# Altium PCB Eurocard VME 3U (3.937 x 6.299 inches).PCBDOC
Units mm, origin at the board's own origin, x right, y up, seen from the top; angles counter-clockwise.
Board outline 159.99 x 100 mm, 8 copper layers (TopLayer, MidLayer1, MidLayer2, MidLayer3, MidLayer4, MidLayer5, MidLayer6, BottomLayer); 1 components, 0 nets, 100 pads, 0 vias.
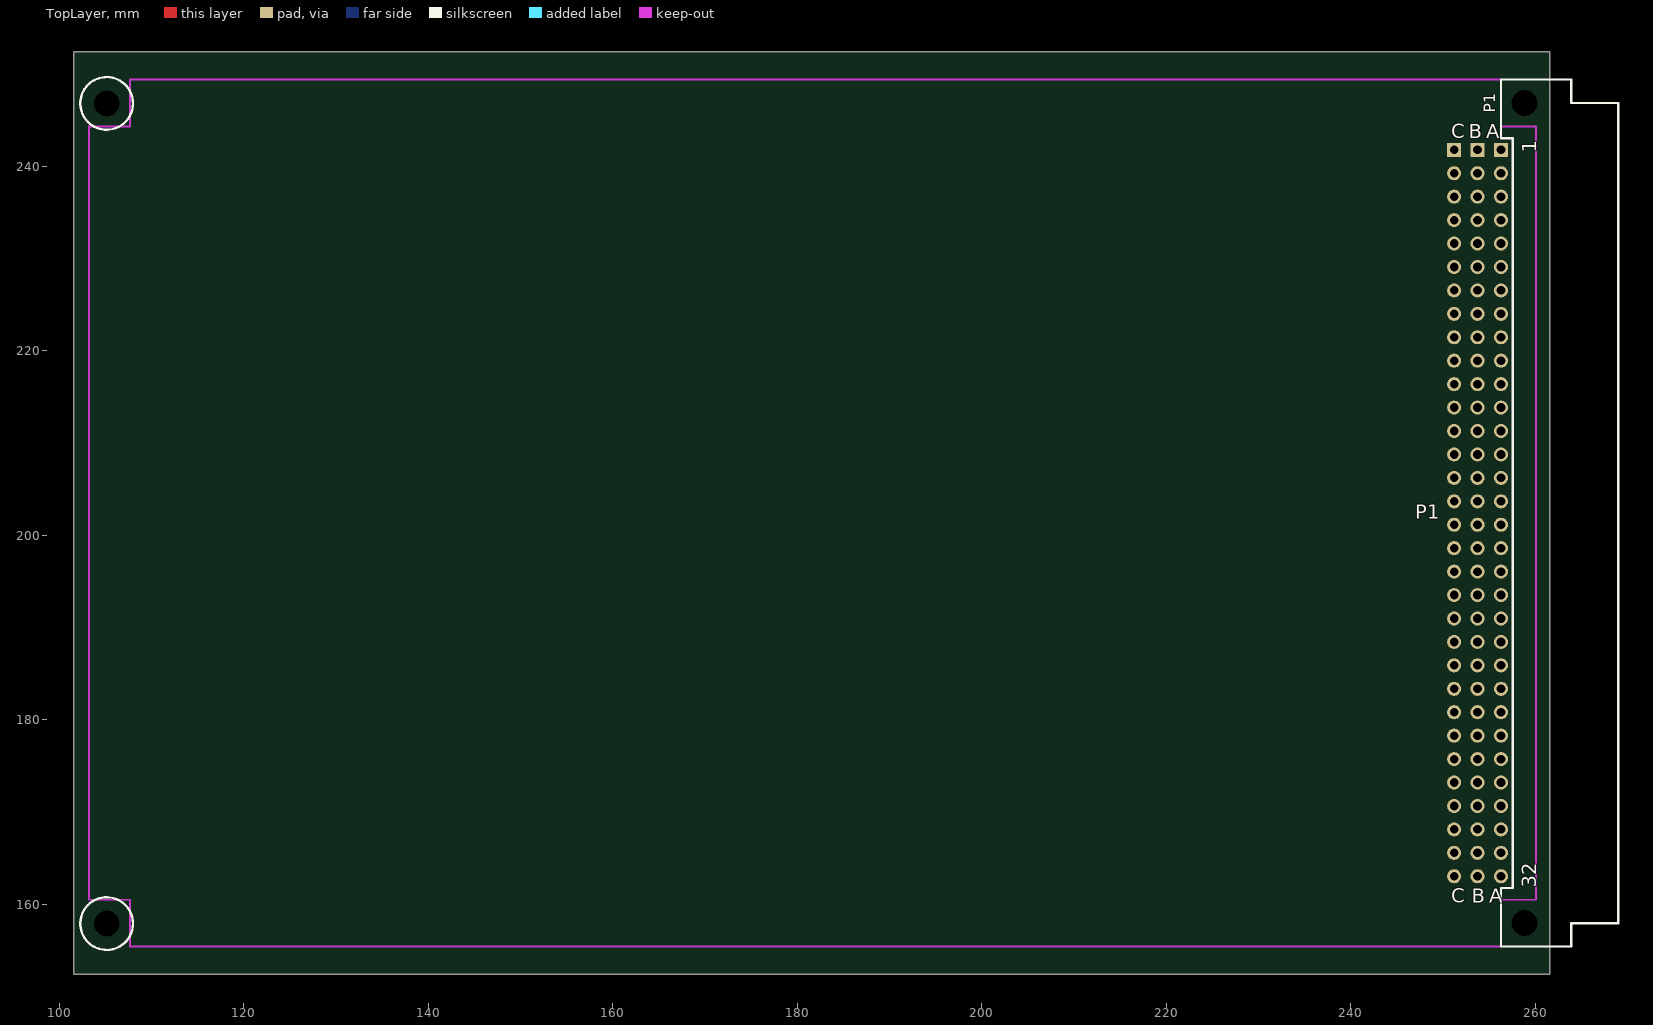
[diagram p0: TopLayer view]
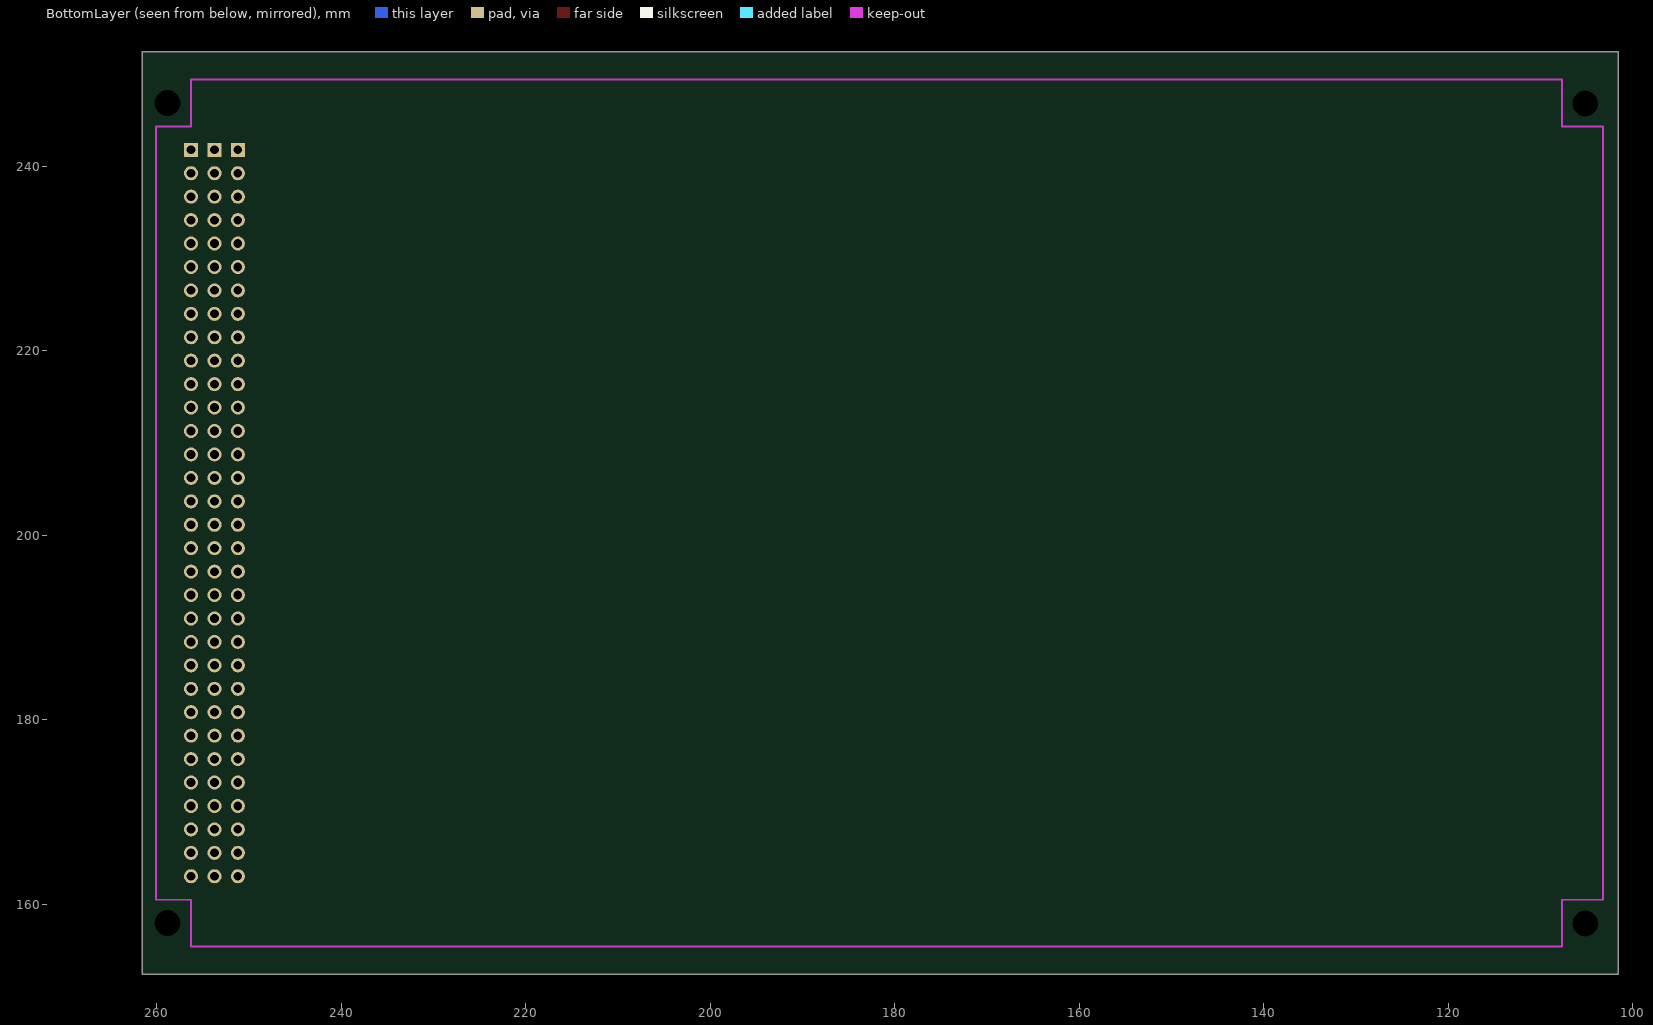
[diagram p1: BottomLayer view, seen from below]
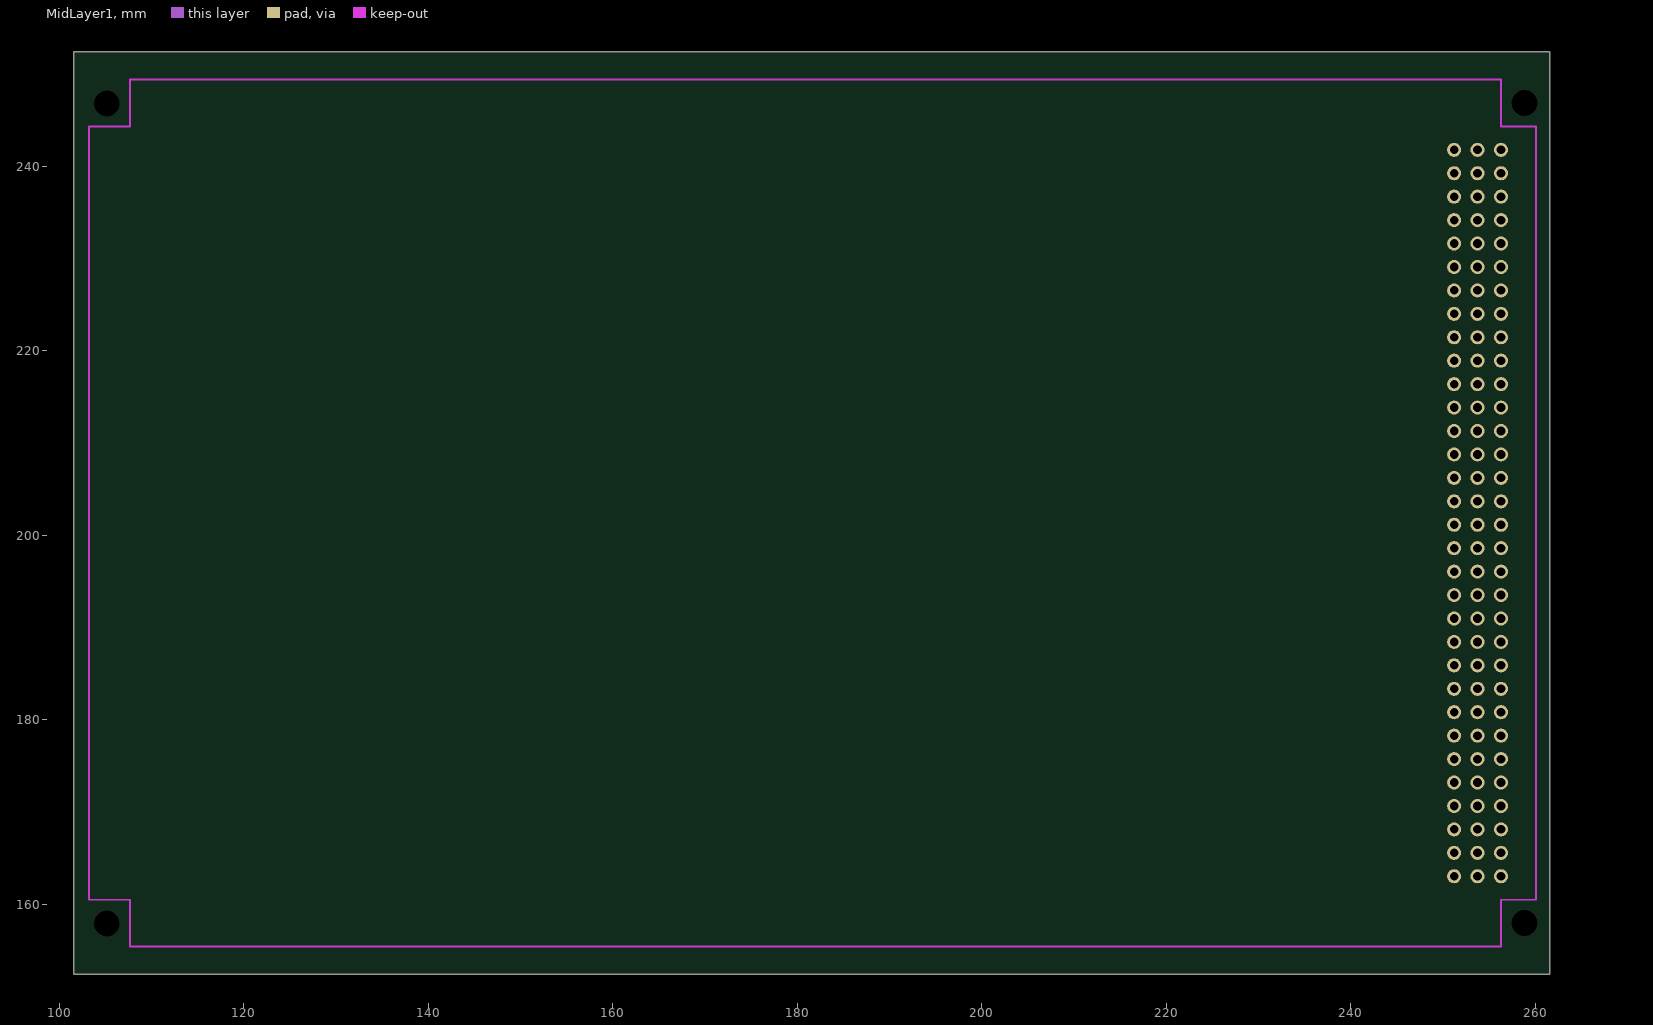
[diagram p2: MidLayer1]
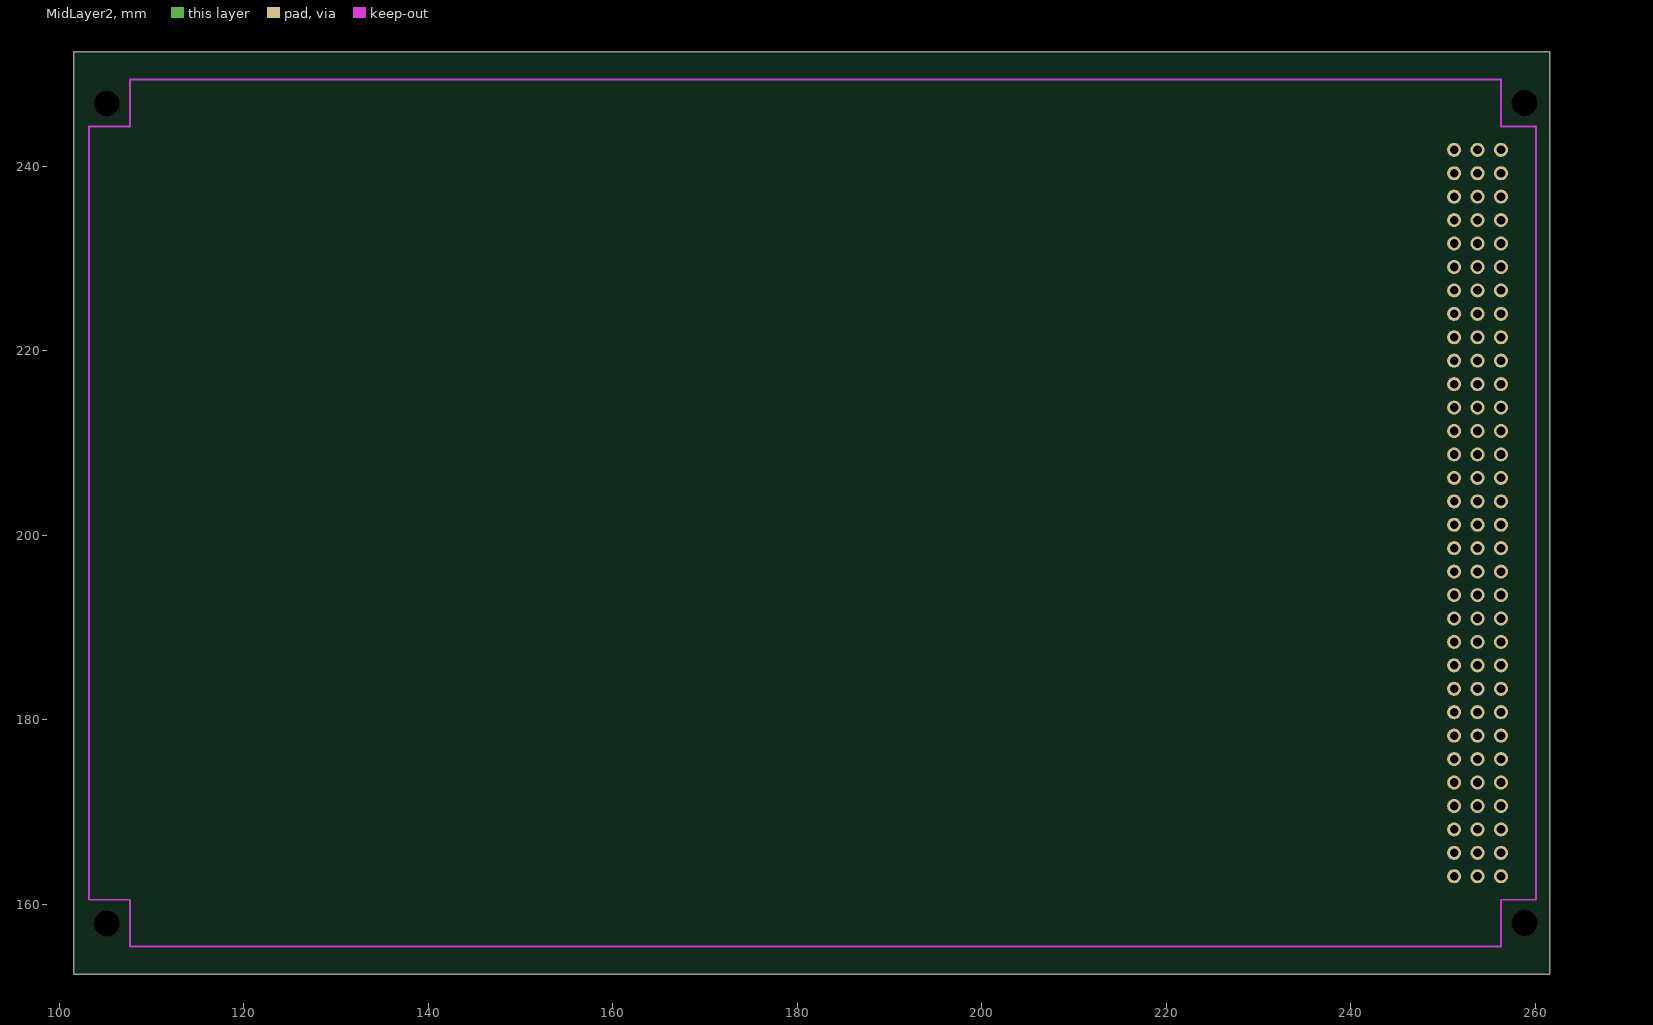
[diagram p3: MidLayer2]
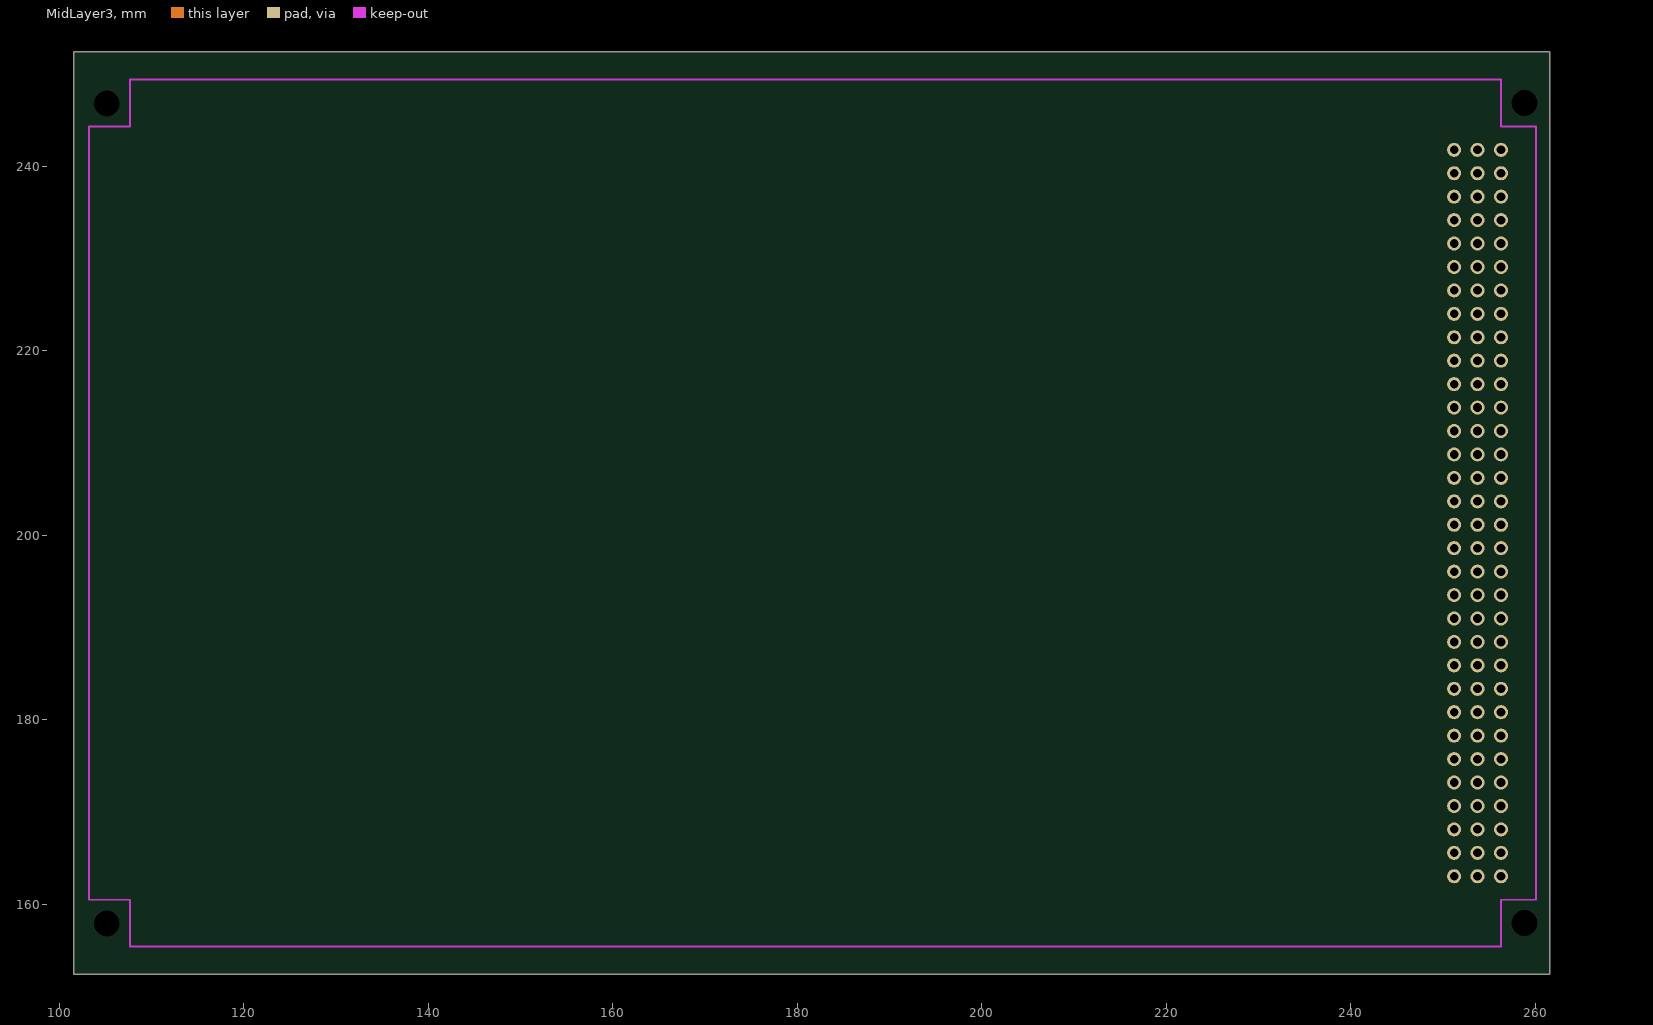
[diagram p4: MidLayer3]
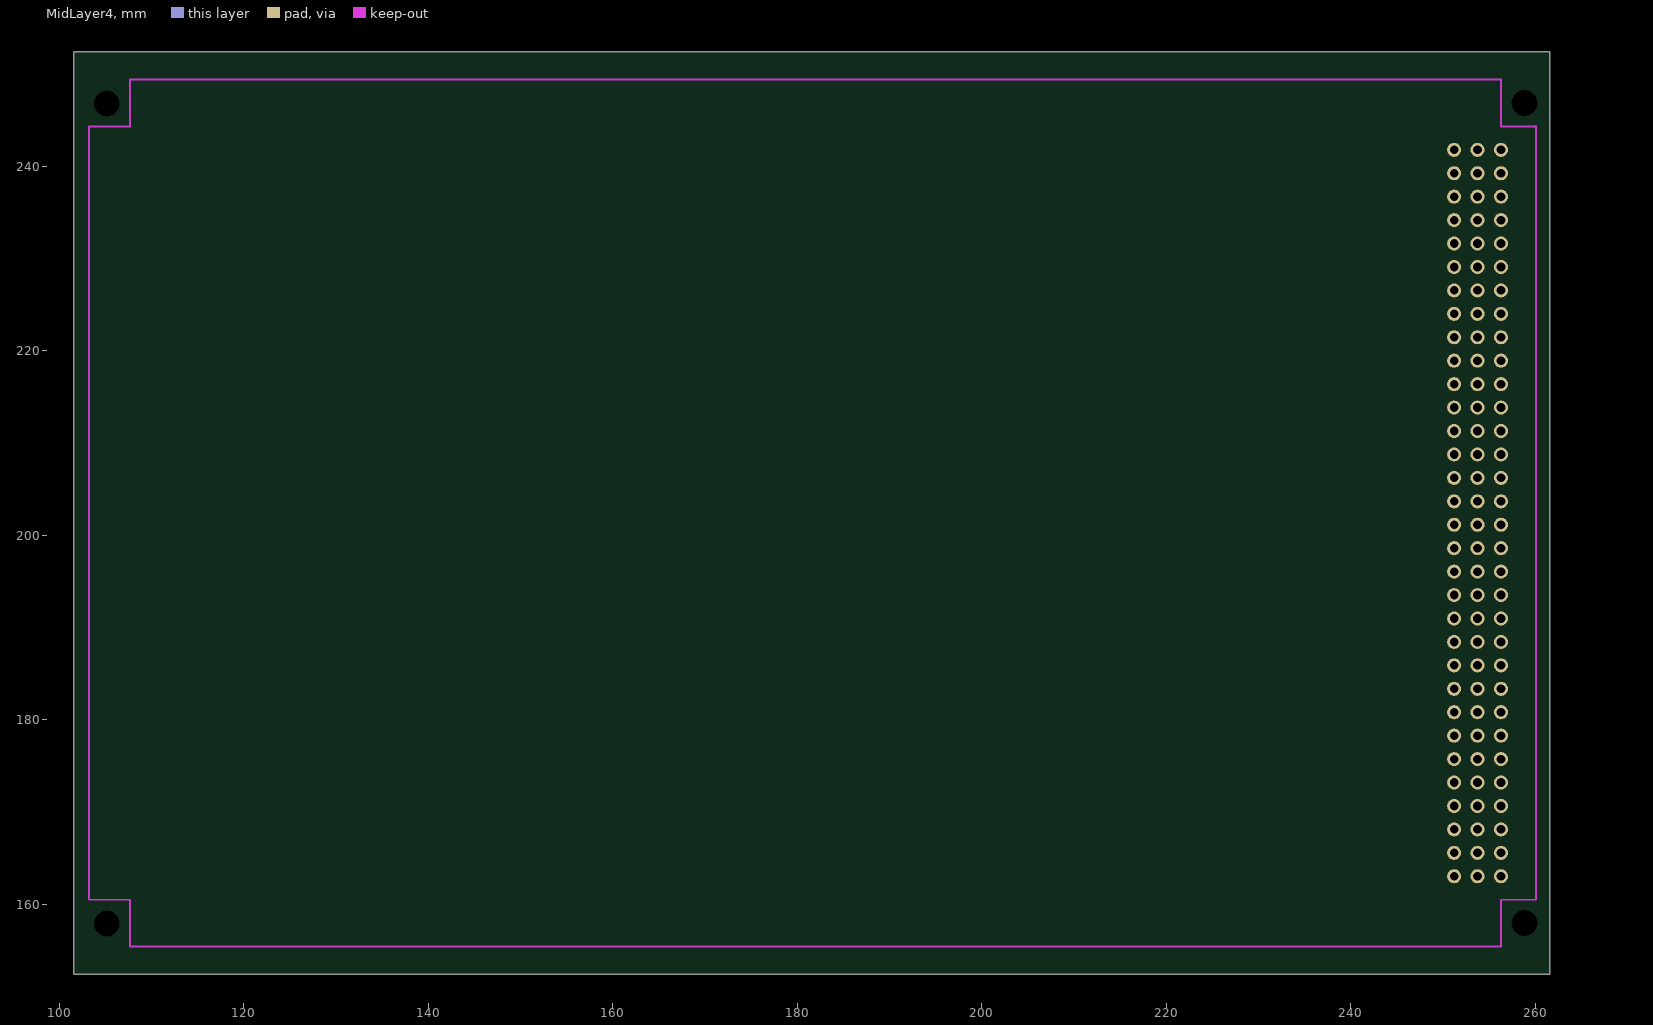
[diagram p5: MidLayer4]
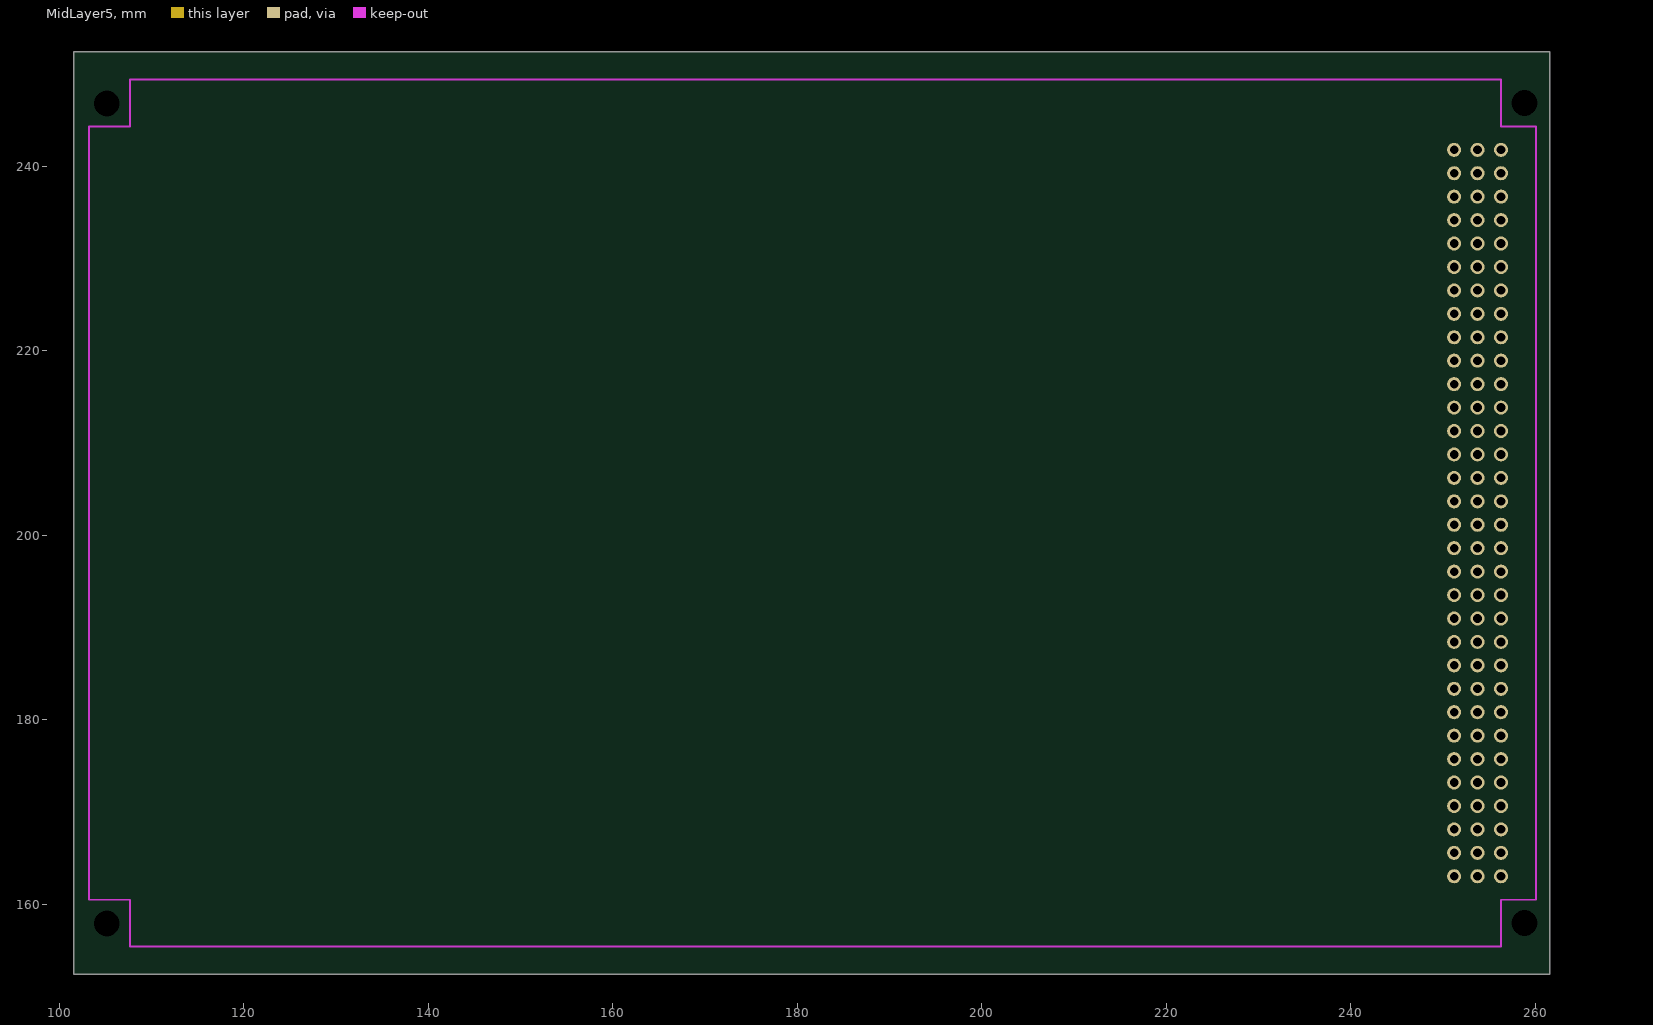
[diagram p6: MidLayer5]
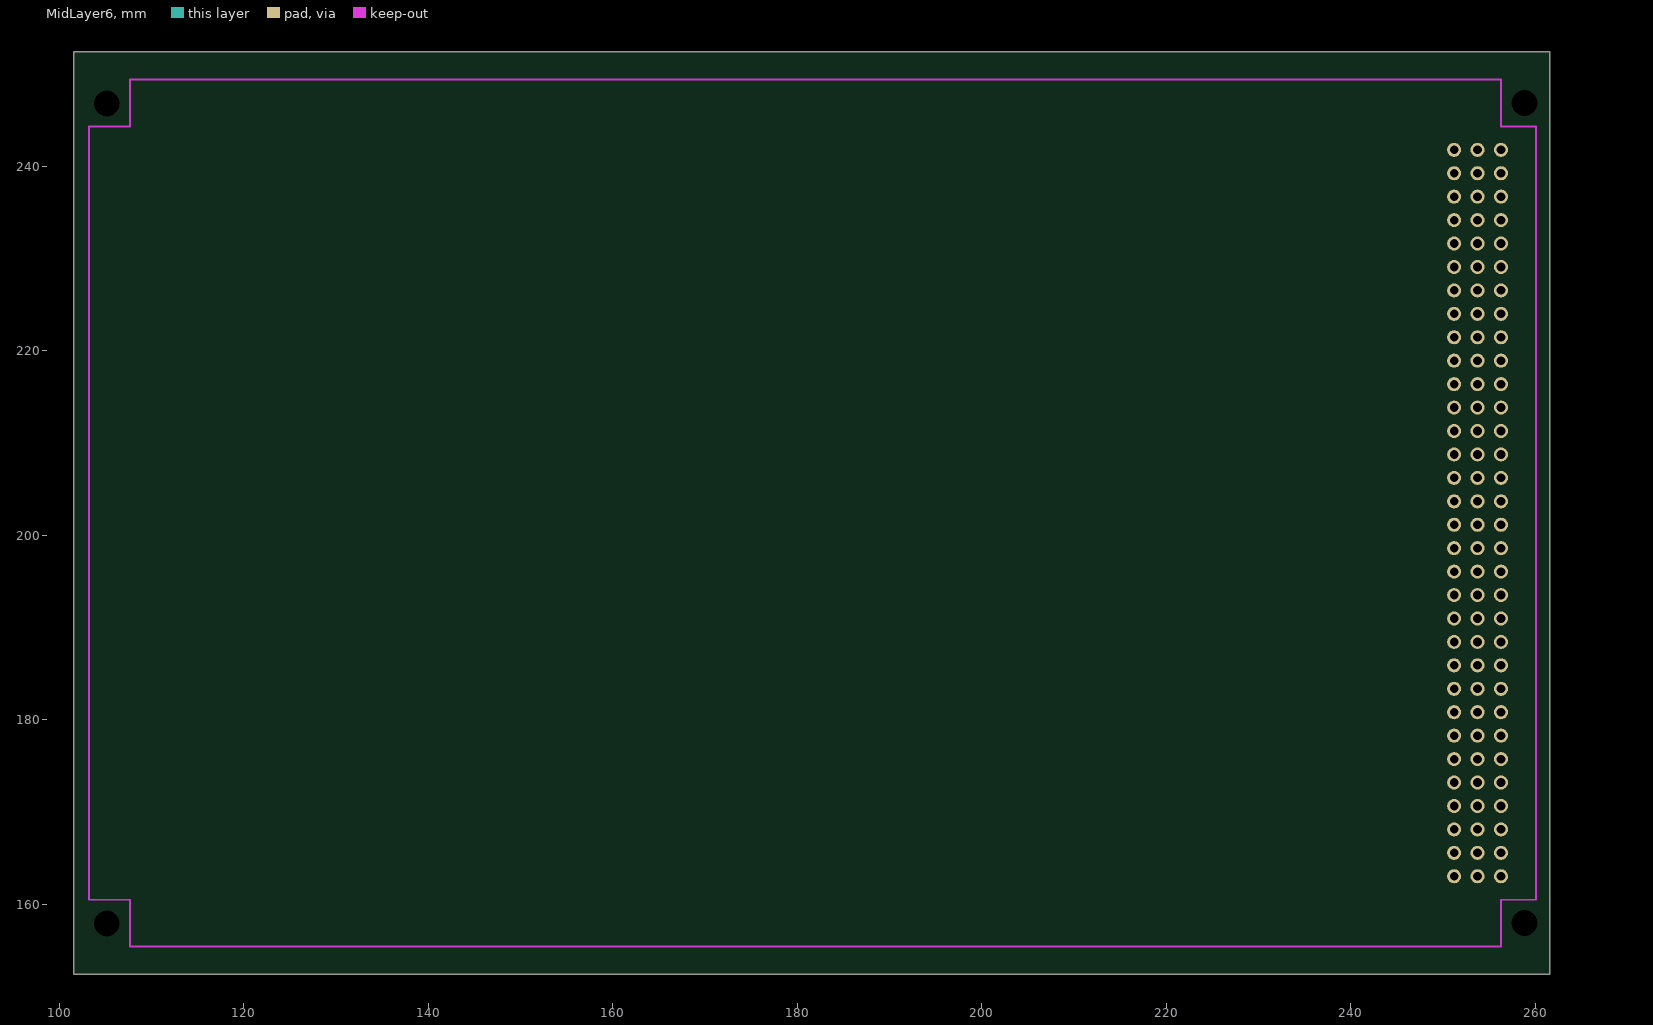
[diagram p7: MidLayer6]

## Layer stack, top to bottom
TopLayer: signal copper 0.0356
Dielectric: core 0.32, FR-4, Dk 4.8
MidLayer1: signal copper 0.0356
Dielectric: prepreg 0.32, FR-4, Dk 4.8
MidLayer2: signal copper 0.0356
Dielectric: core 0.32, FR-4, Dk 4.8
MidLayer3: signal copper 0.0356
Dielectric: prepreg 0.32, FR-4, Dk 4.8
MidLayer4: signal copper 0.0356
Dielectric: core 0.32, FR-4, Dk 4.8
MidLayer5: signal copper 0.0356
Dielectric: prepreg 0.32, FR-4, Dk 4.8
MidLayer6: signal copper 0.0356
Dielectric: core 0.32, FR-4, Dk 4.8
BottomLayer: signal copper 0.0356

## Board outline
101.6,152.4 261.595,152.4 261.595,252.4 101.6,252.4

## Design rules (kind name [scope] priority, off if disabled: settings)
Clearance [All] p1: gap=0.254
FabricationTestPointUsage TestPointUsage [All] p1: valid=0 allowmultiple=FALSE
FabricationTestpoint Testpoint [All] p1: side=3 testpointundercomponent=TRUE minsize=1.016 maxsize=2.54 preferedsize=1.524 minholesize=0.508 maxholesize=1.016 preferedholesize=0.813 testpointgrid=0.025 allowsidetop=TRUE allowsidebottom=TRUE usegrid=TRUE gridtolerance=0
PlaneClearance [All] p1: clearance=0.254
PolygonConnect [All] p1: connectstyle=Relief reliefconductorwidth=0.254 reliefentries=4 polygonreliefangle="90 Angle" airgapwidth=0.254
RoutingVias [All] p1: holewidth=0.711 width=1.27 viastyle="Through Hole" minholewidth=0.711 minwidth=1.27 maxholewidth=0.711 maxwidth=1.27
SilkToSolderMaskClearance SilkscreenOverComponentPads [IsPad] p1: minsilkscreentomaskgap=0.254 clearancetoexposedcopper=TRUE
SolderMaskExpansion [All] p1: expansion=0.051
Width [All] p1: maxlimit=0.254 minlimit=0.254 preferedwidth=0.254
24 further rules are at their usual default settings.

## Components (designator, comment, footprint, x,y, rotation, side; value= is the part's Value field where it differs from the comment)
P1 "CNVME96" CNVME96 256.286,241.783 r90 top locked

## Footprints (in the part's own frame and the unit in brackets; to place one, negate y for a bottom-side part, rotate by r counter-clockwise, add the part's x,y. Pads: shape width x height; smd on the part's side, far side on the other; paste and mask are expansions set on the pad)
CNVME96 [mil]
  round 50 hole 110: 97(200,-100) 98(-3300,-100)
  rect 60x60 / inner round 60 / far side rect 60x60 hole 37: A1(0,0) B1(0,100) C1(0,200)
  round 60 hole 37: A2(-100,0) A3(-200,0) A4(-300,0) A5(-400,0) A6(-500,0) A7(-600,0) A8(-700,0) A9(-800,0) A10(-900,0) A11(-1000,0) A12(-1100,0) A13(-1200,0) A14(-1300,0) A15(-1400,0) A16(-1500,0) A17(-1600,0) A18(-1700,0) A19(-1800,0) A20(-1900,0) A21(-2000,0) A22(-2100,0) A23(-2200,0) A24(-2300,0) A25(-2400,0) A26(-2500,0) A27(-2600,0) A28(-2700,0) A29(-2800,0) A30(-2900,0) A31(-3000,0) A32(-3100,0) B2(-100,100) B3(-200,100) B4(-300,100) B5(-400,100) B6(-500,100) B7(-600,100) B8(-700,100) B9(-800,100) B10(-900,100) B11(-1000,100) B12(-1100,100) B13(-1200,100) B14(-1300,100) B15(-1400,100) B16(-1500,100) B17(-1600,100) B18(-1700,100) B19(-1800,100) B20(-1900,100) B21(-2000,100) B22(-2100,100) B23(-2200,100) B24(-2300,100) B25(-2400,100) B26(-2500,100) B27(-2600,100) B28(-2700,100) B29(-2800,100) B30(-2900,100) B31(-3000,100) B32(-3100,100) C2(-100,200) C3(-200,200) C4(-300,200) C5(-400,200) C6(-500,200) C7(-600,200) C8(-700,200) C9(-800,200) C10(-900,200) C11(-1000,200) C12(-1100,200) C13(-1200,200) C14(-1300,200) C15(-1400,200) C16(-1500,200) C17(-1600,200) C18(-1700,200) C19(-1800,200) C20(-1900,200) C21(-2000,200) C22(-2100,200) C23(-2200,200) C24(-2300,200) C25(-2400,200) C26(-2500,200) C27(-2600,200) C28(-2700,200) C29(-2800,200) C30(-2900,200) C31(-3000,200) C32(-3100,200)
  silkscreen extent -3400,-500 300,0

## Free pads (board coordinates)
  round 1.27 hole 2.794: 1(105.156,246.812) 2(105.156,157.912)

## Nets (pads, with @x,y where several pads share a name; then routed paths per layer and width w, separated by ;. In a path a pad name is that pad's centre, name@x,y a point inside that pad or via, vN(x,y) a via of type N, cw(c..) or ccw(c..) an arc to the next point about the centre after c; other vN are vias at no path point)
pads on no net: P1.97 P1.98 P1.A1 P1.A2 P1.A3 P1.A4 P1.A5 P1.A6 P1.A7 P1.A8 P1.A9 P1.A10 P1.A11 P1.A12 P1.A13 P1.A14 P1.A15 P1.A16 P1.A17 P1.A18 P1.A19 P1.A20 P1.A21 P1.A22 P1.A23 P1.A24 P1.A25 P1.A26 P1.A27 P1.A28 P1.A29 P1.A30 P1.A31 P1.A32 P1.B1 P1.B2 P1.B3 P1.B4 P1.B5 P1.B6 P1.B7 P1.B8 P1.B9 P1.B10 P1.B11 P1.B12 P1.B13 P1.B14 P1.B15 P1.B16 P1.B17 P1.B18 P1.B19 P1.B20 P1.B21 P1.B22 P1.B23 P1.B24 P1.B25 P1.B26 P1.B27 P1.B28 P1.B29 P1.B30 P1.B31 P1.B32 P1.C1 P1.C2 P1.C3 P1.C4 P1.C5 P1.C6 P1.C7 P1.C8 P1.C9 P1.C10 P1.C11 P1.C12 P1.C13 P1.C14 P1.C15 P1.C16 P1.C17 P1.C18 P1.C19 P1.C20 P1.C21 P1.C22 P1.C23 P1.C24 P1.C25 P1.C26 P1.C27 P1.C28 P1.C29 P1.C30 P1.C31 P1.C32

## Keep-outs
KeepOutLayer:
  lines w0.203: 103.251,160.503 107.696,160.503 107.696,155.423 256.286,155.423 256.286,160.503 260.096,160.503 260.096,244.323 256.286,244.323 256.286,249.403 107.696,249.403 107.696,244.323 103.251,244.323 103.251,160.503

## Other copper
TopLayer:
  text ".GTL" at 253.975,256.21 h2.29
MidLayer1:
  text ".G1" at 253.975,256.21 h2.29
MidLayer2:
  text ".G2" at 253.975,256.21 h2.29
MidLayer3:
  text ".G3" at 253.975,256.21 h2.29
MidLayer4:
  text ".G4" at 253.975,256.21 h2.29
MidLayer5:
  text ".G5" at 253.975,256.21 h2.29
MidLayer6:
  text ".G6" at 253.975,256.21 h2.29
BottomLayer:
  text "P/N XXXXXX-XXX REV A" at 135.128,257.48 h1.91
  text ".GBL" at 253.975,256.21 h2.29

## Silkscreen, mask and mechanical layers (free items; w line width, h text height)
TopOverlay:
  circle w0.254: c105.156,157.912 r2.857
  circle w0.254: c105.156,246.812 r2.857
  rectangle: 108.737,270.002 127.787,275.082
  rectangle: 108.737,262.636 127.787,267.716
  lines w0.254: 136.972,272.617 ccw(c138.201,273.621) 136.975,272.614
  text "C" at 139.598,272.669 h1.52
  text "2002 COMPANY NAME" at 143.408,272.669 h1.91
  text "S/N" at 102.387,271.462 h1.91
  text "BOARD NAME" at 139.598,268.224 h1.91
  text "ASSY NO.: XXXXXX" at 139.598,264.414 h1.91
  text "REV" at 102.387,263.906 h1.91
  text ".GTO" at 253.975,256.21 h2.29
  text "P1" at 246.973,201.778 h1.52
TopPaste:
  text ".GTP" at 253.975,256.21 h2.29
BottomPaste:
  text ".GBP" at 253.975,256.21 h2.29
TopSolder:
  text ".GTS" at 253.975,256.21 h2.29
BottomSolder:
  text ".GBS" at 253.975,256.21 h2.29
Mechanical1:
  the board outline again, w0.508
Mechanical4:
  text ".Pcb_File_Name_No_Path" at 205.715,261.036 h2.29
  text ".Printout_Name" at 205.715,256.21 h2.29
DrillDrawing:
  text ".LEGEND" at 274.701,157.201 h2.29
  text "Drilling Details." at 274.701,153.391 h2.29

## Dimensions
105.156,151.892 to 101.6,152.4 on Mechanical4
101.092,157.912 to 101.6,152.4 on Mechanical4

## Text inside footprints (layer, text, board x,y; h text height)
P1: TopOverlay "C" at 250.888,243.053 h1.52; TopOverlay "B" at 252.793,243.053 h1.52; TopOverlay "A" at 254.698,243.053 h1.52; TopOverlay "C" at 250.888,160.185 h1.52; TopOverlay "B" at 253.111,160.185 h1.52; TopOverlay "A" at 255.016,160.185 h1.52; TopOverlay "32" at 260.096,161.773 h1.52 r90; TopOverlay "1" at 260.096,241.465 h1.52 r90